# Altium PCB PCB_big.PcbDoc (part 2 of 2)
Units mil, origin at the board's own origin, x right, y up, seen from the top; angles counter-clockwise.
Board outline 3000 x 3000 mil, 2 copper layers (Top Layer, Bottom Layer); 49 components, 129 nets, 355 pads, 242 vias.
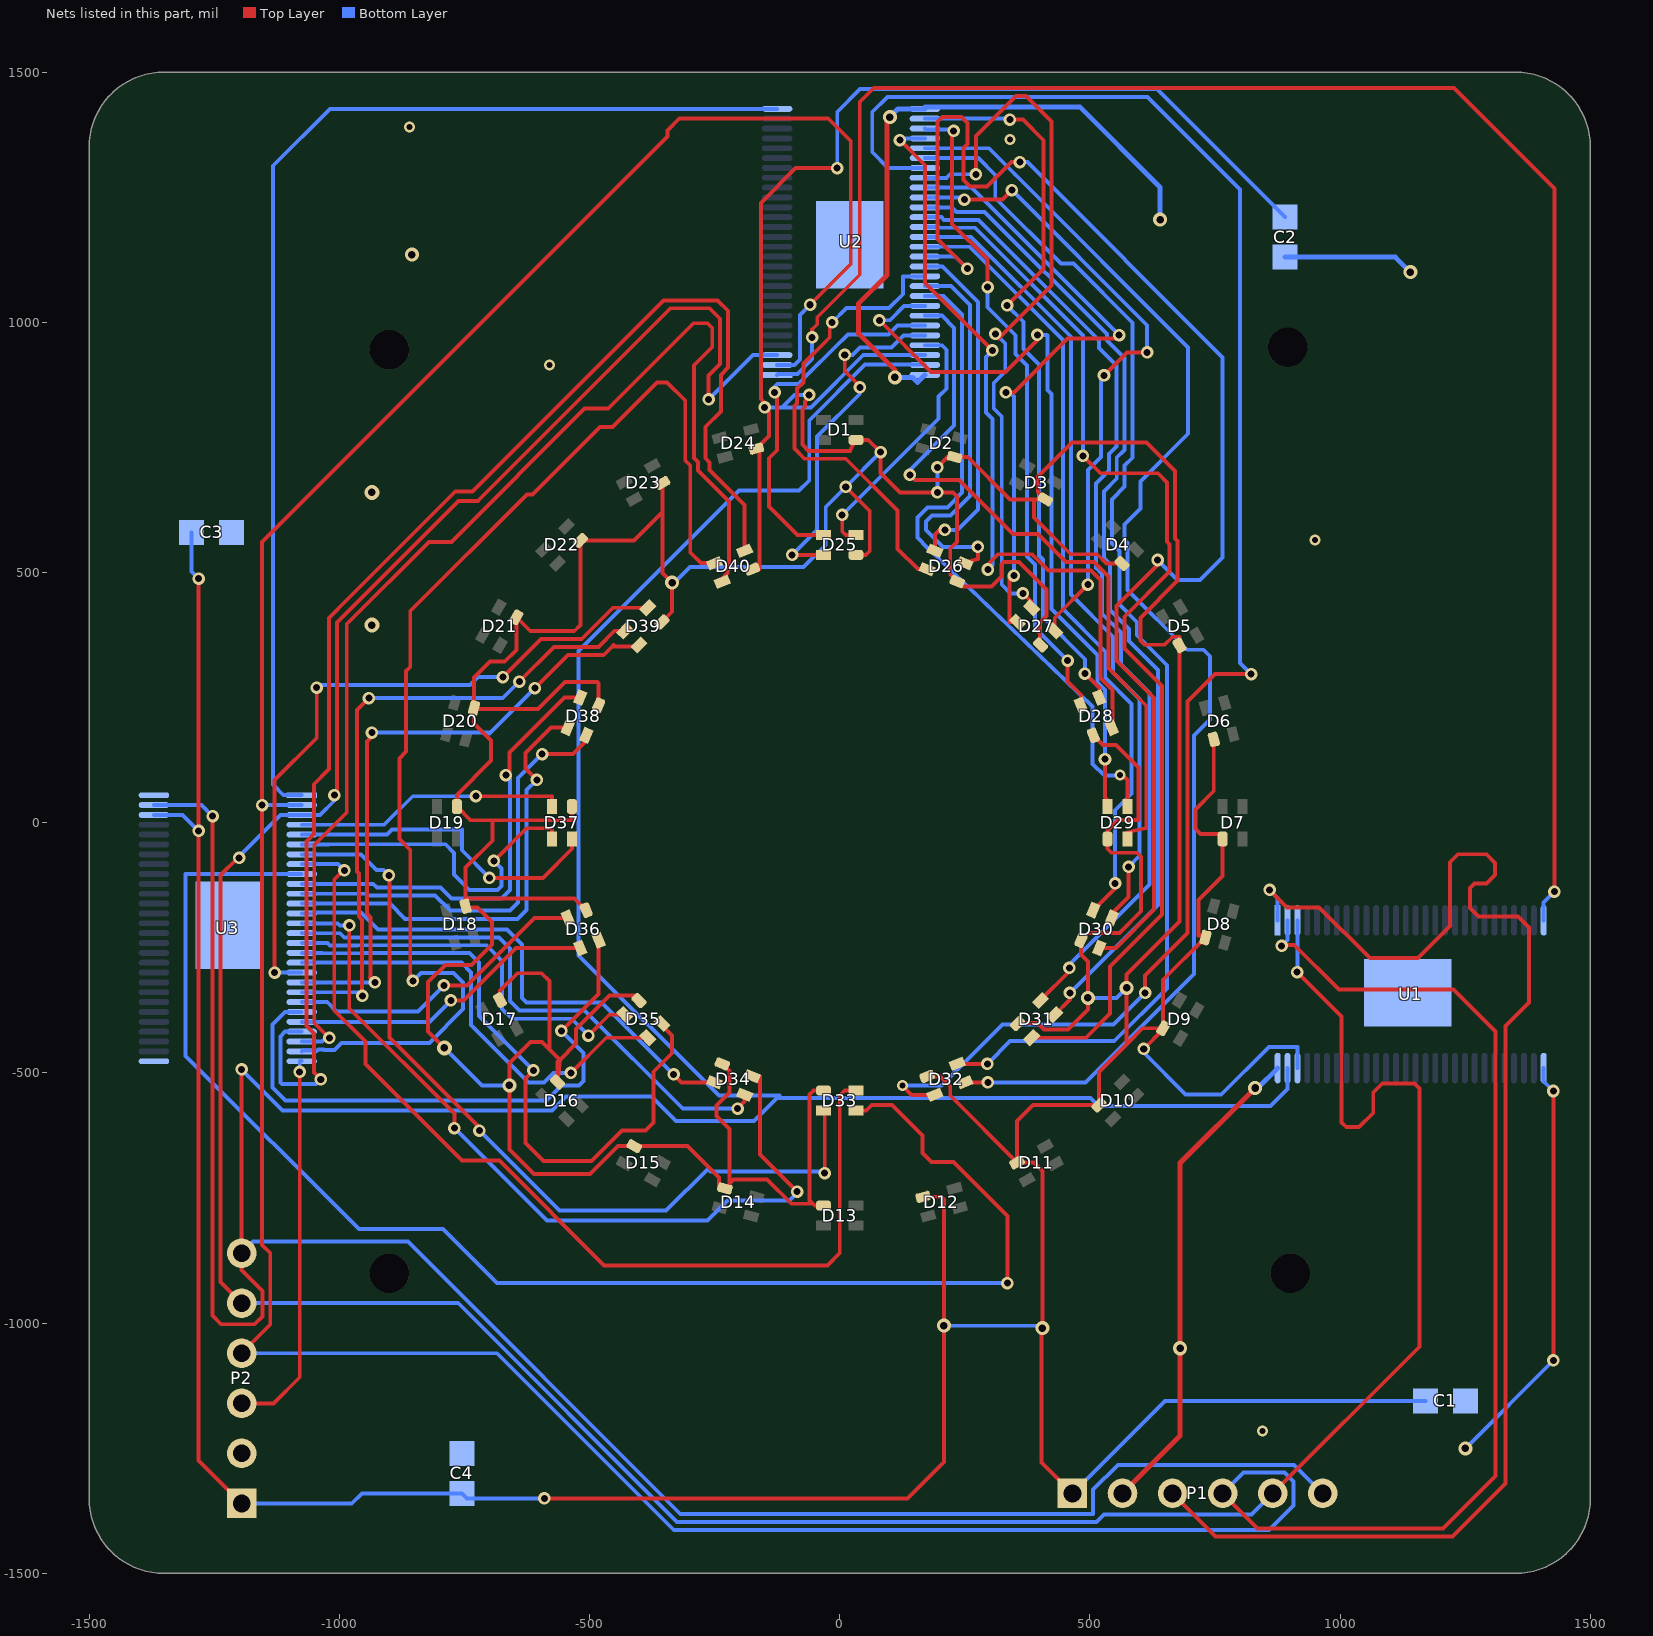
[diagram p2: the nets of this part, all layers, seen from the top]

## Via types
v1: diameter 25, hole 14, Top Layer to Bottom Layer, 214 vias
v2: diameter 28, hole 15, Top Layer to Bottom Layer, 16 vias
v3: diameter 22, hole 12, Top Layer to Bottom Layer, 7 vias
v4: diameter 30, hole 15, Top Layer to Bottom Layer, 5 vias

## Nets (pads, with @x,y where several pads share a name; then routed paths per layer and width w, separated by ;. In a path a pad name is that pad's centre, name@x,y a point inside that pad or via, vN(x,y) a via of type N, cw(c..) or ccw(c..) an arc to the next point about the centre after c; other vN are vias at no path point) (continued)
D25_B: D25.4 U2.53 | length 526
  Top Layer w7.87: v1(5,615) 5,582 12,575 D25.4@32.5,575
  Bottom Layer w7.87: v1(5,615) 197.2,807.2 197.2,851.44 212.95,867.18 212.95,945.11 204,954.06 U2.53@170.28,954.05
D25_G: D25.3 U2.51 | length 734
  Top Layer w7.87: v1(-130,860) -125.62,860 -125.31,860.31 -125.31,744.31 -141.31,728.31 -141.31,632.31 -84,575 D25.3@-32.5,575
  Bottom Layer w7.87: v1(-130,860) -130,871 -124,877 -85,877 -82.38,877 -63,896.38 -10,949.38 16.12,975.5 97.08,975.5 115,993.43 U2.51@170.28,993.43
D25_R: D25.2 U2.52 | length 707.2
  Top Layer w7.87: v1(-95,535) D25.2@-32.5,535 ; v1(10,935) 10,902.96 40,872.96 v1(40,870)
  Bottom Layer w7.87: v1(-95,535) -45.19,584.81 -45.19,771.81 40,857 v1(40,870) ; v1(10,935) 25.42,935 40.42,950 103.26,950 127,973.74 U2.52@170.28,973.74
D26_B: D26.4 U2.47 | length 783.3
  Top Layer w7.87: D26.4@250.07,518.79 276.18,526.98 v1(276.18,551)
  Bottom Layer w7.87: U2.47@170.28,1072.16 222.56,1072.17 260.44,1034.28 260.44,653.17 221.52,614.25 184.25,614.25 172,602 172,585 206,551 v1(276.18,551)
D26_G: D26.3 U2.45 | length 689.1
  Top Layer w7.87: D26.3@190.02,543.67 190.02,575.96 199.06,585 v1(210,585)
  Bottom Layer w7.87: U2.45@170.28,1111.53 205.46,1111.54 276.19,1040.81 276.19,626.19 235,585 v1(210,585)
D26_R: D26.2 U2.46 | length 938
  Top Layer w7.87: v1(-15,1000) -20,995 -20,970 -30,960 -72.74,917.26 -72.74,880 -85.31,867.43 -85.31,838.04 -90.57,832.78 -90.57,747.57 -70.31,727.31 12,727.31 115.47,623.84 115.47,547.24 156,506.71 D26.2@174.71,506.71
  Bottom Layer w7.87: v1(-15,1000) 13.31,1028.31 98.31,1028.31 126,1056 126,1091.85 U2.46@170.28,1091.85
D27_B: D27.4 U2.38 | length 1275.4
  Top Layer w7.87: v1(249,1245) 325,1245 v1(344,1264) ; D27.4@429.57,383.61 429.57,409.57 v1(496,476) ; v1(528,894) 574,940 v1(614,940)
  Bottom Layer w7.87: U2.38@170.28,1249.33 244.67,1249.33 v1(249,1245) ; v1(344,1264) 614,994 v1(614,940) ; v1(496,476) 496,705.11 521.95,731.06 521.95,887.95 v1(528,894)
D27_G: D27.3 U2.36 | length 1487
  Top Layer w7.87: v1(272,1295.71) 272,1372 352,1452 372,1452 423.06,1400.94 423.06,1073.06 317.31,967.31 311,973.62 v1(311,977) ; v1(366,458.47) 383.61,440.87 D27.3@383.61,429.57
  Bottom Layer w7.87: U2.36@170.28,1288.7 213,1288.7 220.01,1295.71 v1(272,1295.71) ; v1(311,977) 330.68,957.32 330.68,901.77 307.69,878.77 307.69,827.31 323.69,811.31 323.69,476.16 341.37,458.47 v1(366,458.47)
D27_R: D27.2 U2.37 | length 1283.4
  Top Layer w7.87: v1(332,860) 348,860 455.19,967.19 558,967.19 v1(558,974.27) ; v1(348,494) 338.75,494 338.75,401.28 D27.2@355.32,401.28
  Bottom Layer w7.87: U2.37@170.28,1269.01 170.57,1269.31 262.96,1269.31 v1(558,974.27) ; v1(332,860) 340,860 348,852 v1(348,494)
D28_B: D28.4 U2.32 | length 1572.9
  Top Layer w7.87: v1(120,1364) 170.28,1313.72 170.28,1078.72 v1(305,944) ; v1(296,506) 296,516.44 316,536.44 384.56,536.44 417,504 502.38,504 521.25,485.13 521.25,289.37 545.35,265.28 545.35,190.02 D28.4@543.67,190.02
  Bottom Layer w7.87: v1(120,1364) 123.44,1367.44 U2.32@170.28,1367.44 ; v1(296,506) 305,515 305,806.88 291.94,819.94 291.94,930.94 v1(305,944)
D28_G: D28.3 U2.30 | length 1475
  Top Layer w7.87: v1(334.55,1033.57) 407.31,1106.33 407.31,1363.69 366,1405 v1(340,1405) ; v1(490,298) 518.79,269.21 D28.3@518.79,250.07
  Bottom Layer w7.87: U2.30@170.28,1406.81 170.36,1406.89 338.11,1406.89 v1(340,1405) ; v1(334.55,1033.57) 367.06,1001.06 367.06,946.88 398,915.94 398,534.06 406.06,526 406.06,410.68 490,326.74 v1(490,298)
D28_R: D28.2 U2.31 | length 1314.5
  Top Layer w7.87: v1(227.42,1382.58) 224.69,1379.85 224.69,1196.69 295.31,1126.07 v1(295.31,1070.06) ; v1(455.1,323.91) 455.1,282.42 481.84,255.69 D28.2@481.84,234.76
  Bottom Layer w7.87: U2.31@170.28,1387.12 172.25,1385.16 224.84,1385.16 v1(227.42,1382.58) ; v1(295.31,1070.06) 295.31,1030 351.31,974 351.31,936.63 374.31,913.63 374.31,532.31 390.31,516.31 390.31,388.7 v1(455.1,323.91)
D29_B: D29.4 U2.50 | length 1465.3
  Top Layer w7.87: v1(140,695) 150,685 238.27,685 346.11,577.16 395.84,577.16 452.31,520.69 507.96,520.69 537,491.65 537,309.16 612.4,233.76 612.4,-10.6 575,-19 D29.4@575,-32.5
  Bottom Layer w7.87: v1(140,695) 140,705 228.7,793.7 228.7,988.41 204,1013.11 U2.50@170.28,1013.11
D29_G: D29.3 U2.48 | length 1332.5
  Top Layer w7.87: v3@560,94 566,94 575,85 D29.3@575,32.5
  Bottom Layer w7.87: U2.48@170.28,1052.48 207.41,1052.48 244.44,1015.45 244.44,659.44 215,630 175,630 155,610 155,569.6 175.74,548.86 505,232 505,117.62 528.62,94 v3@560,94
  other v3: 560,95
D29_R: D29.2 U2.49 | length 1518
  Top Layer w7.87: v1@85.04,1009.96 v1(79.09,1004) 182.17,900.91 330.91,900.91 395,965 v1(395,975) ; v1(530,127) 530,51 535,46 D29.2@535,32.5
  Bottom Layer w7.87: v1(79.09,1004) 100,1004 128.8,1032.8 U2.49@170.28,1032.8 ; v1(395,975) 395,974.83 413.4,974.83 415,973.23 415,865 423,857 423,426.76 514.76,335 514.76,280.24 530,265 v1(530,127)
D30_B: D30.4 U2.44 | length 2773.4
  Top Layer w7.87: v1(255,1107) 195.69,1166.31 195.69,1400.69 205,1410 243,1410 255,1398 255,1356 247,1348 247,1284 260,1271 294,1271 343,1320 v1(360,1320) ; D30.4@518.79,-250.07 551.57,-250.07 628.2,-173.44 628.2,249.18 553.19,324.19 553.19,433.19 635,515 v1(635,525)
  Bottom Layer w7.87: U2.44@170.28,1131.22 230.78,1131.22 v1(255,1107) ; v1(360,1320) 375,1320 765,930 765,530 720,485 675,485 v1(635,525)
D30_G: D30.3 U2.42 | length 1615
  Top Layer w7.87: D30.3@543.67,-190.02 543.67,-181.72 577,-148.39 v1(577,-88)
  Bottom Layer w7.87: U2.42@170.28,1170.59 262.19,1170.59 461.69,971.09 461.69,456.24 546.26,371.67 546.26,300.17 599.06,247.37 599.06,-65.94 v1(577,-88)
D30_R: D30.2 U2.43 | length 1580.5
  Top Layer w7.87: D30.2@506.71,-174.71 550,-131.42 v1(550,-121)
  Bottom Layer w7.87: U2.43@170.28,1150.91 259.6,1150.91 445.94,964.57 445.94,427.09 530.51,342.52 530.51,290.16 583,237.68 583,58 550,25 v1(550,-121)
D31_B: D31.4 U2.41 | length 2188.3
  Top Layer w7.87: D31.4@383.61,-429.57 492,-429.57 540,-381.57 540,-287 644,-183 644,272.94 568.94,348 568.94,411.63 659.31,502 659.31,556.15 653.5,561.95 653.5,563.12 654.31,563.93 654.31,680 636,698.31 520.69,698.31 v1(486,733)
  Bottom Layer w7.87: U2.41@170.28,1190.28 192.5,1190.28 193.88,1188.9 270.4,1188.9 486,973.29 v1(486,733)
D31_G: D31.3 U2.39 | length 1989.7
  Top Layer w7.87: D31.3@429.57,-383.61 460,-353.17 v1(460,-340)
  Bottom Layer w7.87: U2.39@170.28,1229.64 224,1229.65 233.25,1220.39 289.61,1220.39 533.69,976.31 533.69,964 568.94,928.75 568.94,745.05 553.44,729.56 553.44,687.5 527.94,662 527.94,529 540,516.94 540,425 577.76,387.24 577.76,363.22 635.49,305.48 635.49,-164.51 v1(460,-340)
D31_R: D31.2 U2.40 | length 1934.6
  Top Layer w7.87: D31.2@401.28,-355.32 401.28,-354.4 459,-296.68 v1(459,-290)
  Bottom Layer w7.87: U2.40@170.28,1209.96 202.94,1209.96 208.25,1204.65 277.23,1204.65 510.54,971.33 510.54,971.03 517.75,963.82 517.75,948.79 553.1,913.44 553.1,752.14 537.7,736.74 537.7,703.5 512.19,678 512.19,509.44 524.25,497.38 524.25,417.63 562.01,379.87 562.01,315.92 618.76,259.16 618.76,-123.24 459,-283 v1(459,-290)
D32_B: D32.4 U2.35 | length 3401.1
  Top Layer w7.87: v3(125,-525) 143.67,-543.67 D32.4@190.02,-543.67 ; v1(610,-340) 610,-305 694.72,-220.28 694.72,241.99 749.73,297 v1(822,297)
  Bottom Layer w7.87: v3(125,-525) 203,-525 325,-403 547,-403 v1(610,-340) ; U2.35@170.28,1308.39 96.61,1308.39 65,1340 65,1420 95,1450 615,1450 800,1265 800,319 v1(822,297)
D32_G: D32.3 U2.33 | length 2646.6
  Top Layer w7.87: D32.3@250.07,-518.79 v1(296.21,-518.79)
  Bottom Layer w7.87: U2.33@170.28,1347.76 298.24,1347.76 335.69,1310.31 335.69,1309.93 349.93,1295.69 350.31,1295.69 696,950 696,777.31 600.69,682 600.69,628 568.69,596 568.69,565.31 575,559 575,465 694.38,345.62 727.11,345.62 740,332.73 740,206 708,174 708,-302 491.21,-518.79 v1(296.21,-518.79)
D32_R: D32.2 U2.34 | length 2452.1
  Top Layer w7.87: D32.2@234.76,-481.84 v1(295.13,-481.84)
  Bottom Layer w7.87: U2.34@170.28,1328.07 277.02,1328.07 310.69,1294.4 310.69,1248.69 442.38,1117 466.74,1117 584.69,999.05 584.69,729.3 569.19,713.81 569.19,671.5 543.69,646 543.69,558.23 559.25,542.67 559.25,435.75 593.5,401.5 593.5,375.41 654.2,314.72 654.2,-330.8 548.48,-436.52 340.45,-436.52 v1(295.13,-481.84)
D33_B: D33.4 U3.7 | length 1697.1
  Top Layer w7.87: v1(-901,-105) -899.25,-106.75 -899.25,-429.48 -720,-608.73 v1(-720,-615) ; D33.4@-32.5,-575 -32,-575 -30,-577 v1(-30,-700)
  Bottom Layer w7.87: U3.7@-1075,-63.11 -956.58,-63.11 -925.38,-94.31 -911.69,-94.31 v1(-901,-105) ; v1(-720,-615) -560,-775 -347,-775 -263.42,-691.42 -257.91,-696.94 -33.06,-696.94 v1(-30,-700)
D33_G: D33.3 U3.9 | length 2979.2
  Top Layer w7.87: D33.3@32.5,-575 53,-575 64,-564 104,-564 165,-625 165,-660 183,-678 227.27,-678 335,-785.73 v1(335,-920)
  Bottom Layer w7.87: U3.9@-1075,-102.48 -1307,-102.48 -1307,-466 -961,-812 -793,-812 -685,-920 v1(335,-920)
D33_R: D33.2 U3.8 | length 1993.3
  Top Layer w7.87: v1(-990,-95) -991.24,-95 -1010,-113.76 -1010,-375 -948,-437 -948,-482 -755,-675 -680,-675 -470.69,-884.31 -24.31,-884.31 0,-860 0,-545 10,-535 D33.2@32.5,-535
  Bottom Layer w7.87: U3.8@-1075,-82.8 -1002.21,-82.79 v1(-990,-95) v1@-990,-89.82
D34_B: D34.4 U3.13 | length 1030.2
  Top Layer w7.87: v1(-332,-503) -316.21,-518.79 D34.4@-250.07,-518.79
  Bottom Layer w7.87: U3.13@-1075,-181.22 -1049.76,-181.22 -1049.76,-179.25 -956.44,-179.25 -922.38,-213.3 -664.7,-213.3 -635,-243 -635,-350 -625.76,-359.24 -475.76,-359.24 v1(-332,-503)
D34_G: D34.3 U3.15 | length 1111
  Top Layer w7.87: v1(-204,-571.11) -190.02,-557.13 D34.3@-190.02,-543.67
  Bottom Layer w7.87: U3.15@-1075,-220.59 -1074.84,-220.75 -998.63,-220.75 -990.07,-229.31 -969.93,-229.31 -969.67,-229.05 -681.2,-229.05 -658.97,-251.28 -658.97,-356 -639.98,-374.99 -509.76,-374.99 -313.64,-571.11 v1(-204,-571.11)
D34_R: D34.2 U3.14 | length 1652.7
  Top Layer w7.87: v1(-980,-205) -980,-371 -770,-581 v1(-770,-610) ; D34.2@-174.71,-506.71 -159,-506.71 -159,-663 v1(-85,-737)
  Bottom Layer w7.87: U3.14@-1075,-200.9 -1003,-200.9 -998.9,-205 v1(-980,-205) ; v1(-770,-610) -585,-795 -264,-795 -224,-755 -100,-755 -85,-740 v1(-85,-737)
D35_B: D35.4 U3.16 | length 795.9
  Top Layer w7.87: v1(-502.42,-425.42) -460.61,-383.61 D35.4@-429.57,-383.61
  Bottom Layer w7.87: U3.16@-1075,-240.28 -1023.84,-240.27 -1019.05,-245.06 -963.41,-245.06 -963.15,-244.8 -705.92,-244.8 -674.72,-276 -674.72,-372 -655.03,-391.69 -536.15,-391.69 v1(-502.42,-425.42)
D35_G: D35.3 U3.18 | length 889.8
  Top Layer w7.87: v1(-537,-500) -466.57,-429.57 D35.3@-383.61,-429.57
  Bottom Layer w7.87: U3.18@-1075,-279.64 -756,-279.64 -736.83,-298.81 -736.83,-404.55 -622.07,-519.31 -591,-519.31 -571.69,-500 v1(-537,-500)
D35_R: D35.2 U3.17 | length 1298.8
  Top Layer w7.87: v1(-612,-495) -628,-511 -628,-640 -592,-676 -496,-676 -435.32,-615.32 -388,-615.32 -372,-599.32 -372,-497.59 -335,-460.59 -335,-425 -355.32,-404.68 D35.2@-355.32,-401.28
  Bottom Layer w7.87: U3.17@-1075,-259.96 -1034.9,-260.55 -1034.64,-260.81 -956.88,-260.81 -956.63,-260.55 -740,-260.55 -721.08,-279.47 -721.08,-385.92 v1(-612,-495)
D36_B: D36.4 U3.22 | length 616.5
  Top Layer w7.87: v1(-791,-325) -745,-325 -610.02,-190.02 D36.4@-543.67,-190.02
  Bottom Layer w7.87: U3.22@-1075,-358.38 -1024,-358.38 -1005.38,-377 -843,-377 v1(-791,-325)
D36_G: D36.3 U3.24 | length 617.4
  Top Layer w7.87: v1(-777,-355) -752,-355 -647.07,-250.07 D36.3@-518.79,-250.07
  Bottom Layer w7.87: U3.24@-1075,-397.76 -819.75,-397.75 v1(-777,-355)
D36_R: D36.2 U3.23 | length 1172.5
  Top Layer w7.87: v1(-556,-416) -481.84,-341.84 D36.2@-481.84,-234.76
  Bottom Layer w7.87: U3.23@-1075,-378.07 -1108.07,-378.07 -1133.07,-403.07 -1133.07,-528.99 -1107.06,-555 -585.94,-555 -555.94,-525 -521,-525 -512,-516 -512,-460 v1(-556,-416)
D37_B: D37.4 U3.4 | length 544.1
  Top Layer w7.87: v1(-727,53) -575,53 D37.4@-575,32.5
  Bottom Layer w7.87: U3.4@-1075,-4.05 -910.2,-4.05 -853.14,53 v1(-727,53)
D37_G: D37.3 U3.6 | length 687.4
  Top Layer w7.87: v1(-691.25,-76.25) -626,-11 -575,-11 D37.3@-575,-32.5
  Bottom Layer w7.87: U3.6@-1075,-43.43 -1021.06,-43.42 -1020.58,-42.94 -788,-42.94 -770.84,-60.1 -770.84,-103.78 -740.31,-134.31 -684,-134.31 -675.69,-126 -675.69,-91.81 v1(-691.25,-76.25)
D37_R: D37.2 U3.5 | length 651.8
  Top Layer w7.87: v1(-700,-110) -593,-110 -535,-52 D37.2@-535,-32.5
  Bottom Layer w7.87: U3.5@-1075,-23.74 -904.67,-23.74 -894.45,-13.51 -755.44,-13.51 -755.1,-13.85 -755.1,-54.9 v1(-700,-110)
D38_B: D38.4 U3.10 | length 902
  Top Layer w7.87: v1(-667,95) -660,102 -660,140 -549.93,250.07 D38.4@-518.79,250.07
  Bottom Layer w7.87: U3.10@-1075,-122.16 -932.15,-122.16 -925,-129.31 -797.69,-129.31 -776,-151 -676,-151 -659,-134 -659,87 v1(-667,95)
D38_G: D38.3 U3.12 | length 905.5
  Top Layer w7.87: v1(-605.27,85.73) -628,108.47 -628,139 -576.98,190.02 D38.3@-543.67,190.02
  Bottom Layer w7.87: U3.12@-1075,-161.54 -899,-161.53 -868.53,-192 -644,-192 -626,-174 -626,65 v1(-605.27,85.73)
D38_R: D38.2 U3.11 | length 879.7
  Top Layer w7.87: v1(-594.69,137) -533,137 -506.71,163.29 D38.2@-506.71,174.71
  Bottom Layer w7.87: U3.11@-1075,-141.85 -944.27,-141.85 -941.06,-145.06 -808.56,-145.06 -778.06,-175.56 -658.51,-175.56 -642.69,-159.73 -642.69,89 v1(-594.69,137)
D39_B: D39.4 U3.19 | length 1385.6
  Top Layer w7.87: v1(-1129,-299.33) -1129,85 -1045,169 v1(-1045,270) ; v1(-673,291) -597.06,366.94 -515.5,366.94 -452.87,429.57 D39.4@-383.61,429.57
  Bottom Layer w7.87: v1(-1129,-299.33) U3.19@-1075,-299.33 ; v1(-1045,270) -1040,275 -738.75,275 -722.75,291 v1(-673,291)
D39_G: D39.3 U3.21 | length 1300.7
  Top Layer w7.87: v1(-954,-346) -954.69,-345.31 -954.69,-193.93 -960.75,-187.87 -960.75,-101.62 -965,-97.37 -965,224.94 v1(-940.94,249) ; v1(-640.34,282.06) -571.21,351.19 -482.19,351.19 -449.77,383.61 D39.3@-429.57,383.61
  Bottom Layer w7.87: U3.21@-1075,-338.7 -961.3,-338.7 v1(-954,-346) ; v1(-940.94,249) -673.4,249 v1(-640.34,282.06)
D39_R: D39.2 U3.20 | length 1271.8
  Top Layer w7.87: v1(-935,180) -935,172 -945,162 -945,-181.35 -937.31,-189.04 -937.31,-307.44 -938.94,-309.07 v1(-929,-319.01) ; v1(-609.12,269) -542.68,335.44 -471.5,335.44 -451.62,355.32 -451.62,352 -401.28,352 D39.2@-401.28,355.32
  Bottom Layer w7.87: U3.20@-1075,-319.02 v1(-929,-319.01) ; v1(-935,180) -702.12,180 -700.12,178 v1(-609.12,269)
D40_B: D40.4 U3.25 | length 2776.3
  Top Layer w7.87: v1(-1037,-513) -1050.75,-499.25 -1050.75,-421.52 -1065.75,-406.52 -1065.75,-37.79 -1050.75,-22.79 -1050.75,76.94 -1020.69,107 -1020.69,409.3 -984.05,445.95 -768.31,661.69 -733.93,661.69 -351.81,1043.81 -244,1043.81 -223.19,1023 -223.19,909.36 -237.56,894.99 -237.56,822.06 -268.36,791.25 -268.36,728.28 -260,719.92 -260,705 -190.02,635.02 D40.4@-190.02,543.67
  Bottom Layer w7.87: U3.25@-1075,-417.44 -1108,-417.44 -1117.32,-426.76 -1117.32,-518.99 -1114,-522.31 -1046.31,-522.31 v1(-1037,-513)
D40_G: D40.3 U3.27 | length 2404.9
  Top Layer w7.87: v1(-853,-316) -858.15,-310.85 -858.15,-54.13 -879.81,-32.48 -879.81,128.78 -866.5,142.09 -866.5,303.05 -858.15,311.39 -858.15,422.85 -625,656 -613.74,656 -478.74,791 -454.21,791 -365.21,880 -344.75,880 -308.75,844 -308.75,724.13 -298.69,714.07 -298.69,705.15 -298.69,540 -277.48,518.79 D40.3@-250.07,518.79
  Bottom Layer w7.87: U3.27@-1075,-456.81 -1073.03,-454.84 -1043.06,-454.84 -1041.09,-452.87 -1031.51,-452.87 -1030.07,-454.31 -1009.93,-454.31 -995.62,-440 -820,-440 -752.58,-372.58 -752.58,-319.42 -772,-300 -837,-300 v1(-853,-316)
D40_R: D40.2 U3.26 | length 2464
  Top Layer w7.87: v1(-1020,-430) -1050,-400 -1050,-44.31 -985,20.69 -985,397.38 -821.1,561.28 -775.7,561.28 -509.59,827.39 -462.61,827.39 -292,998 -264.44,998 -254.69,988.25 -254.69,950.31 -290.9,914.09 -290.9,728.55 -282.94,720.59 -282.94,711.67 -282.94,703.94 -220.85,641.85 -220.85,507.44 -223.87,504.43 -223.87,499.13 -234.76,488.24 D40.2@-234.76,481.84
  Bottom Layer w7.87: U3.26@-1075,-437.12 -1034.12,-437.12 -1027,-430 v1(-1020,-430)
DATA: P1.3 U1.1 | length 2874.5
  Top Layer w7.87: P1.3@665,-1340 750.75,-1425.75 1224.25,-1425.75 1330,-1320 1330,-406 1377,-359 1377,-209 1354.94,-186.94 1276.32,-186.94 1259.69,-170.31 1259.69,-130 1268,-121.69 1292,-121.69 1309,-104.69 1309,-80 1292,-63 1235,-63 1219.06,-78.94 1219.06,-206.24 1154.99,-270.31 1059.25,-270.31 957.94,-169 894,-169 v1(859,-134)
  Bottom Layer w7.87: v1(859,-134) 875,-150 U1.1@875,-195
DATA_1: U1.28 U2.1 | length 3589.6
  Top Layer w7.87: v1(-55,970) -55,986 -45,996 -45,1010 40,1095 40,1440 68,1468 1227,1468 1428,1267 v1(1428,-137.5)
  Bottom Layer w7.87: U2.1@-125,895 -123.03,896.97 -84.68,896.97 -55,926.65 v1(-55,970) ; U1.28@1406.49,-195 1406.49,-159 v1(1428,-137.5)
DATA_2: U2.28 U3.1 | length 2357.2
  Bottom Layer w7.87: U3.1@-1075,55 -1111.31,55 -1132.31,76 -1132.31,1312.69 -1018.5,1426.5 U2.28@-125,1426.49
GND: C1.1 C2.1 C3.1 C4.1 P1.2 P2.2 U1.29 U1.56 U1.57 U2.29 U2.56 U2.57 U3.29 U3.56 U3.57 | length 3412.7
  Top Layer w7.87: v1(1426,-1074) v1(1426,-536)
  Top Layer w10: v2(100,1410) 94.63,1404.63 94.63,1094.63 37.96,1037.96 37.96,977.04 110,905 v2(110,890) ; P1.2@565,-1340 680,-1225 v2(680,-1050) 680,-680 v2(830,-530)
  Bottom Layer w7.87: v2(1250,-1250) v1(1426,-1074) ; U1.29@1406.49,-490.28 1406.49,-516.49 v1(1426,-536)
  Bottom Layer w10: v2(100,1410) 116.5,1426.5 U2.29@170.28,1426.49 170.28,1430.37 479.63,1430.37 640,1270 v2(640,1205) ; v2(110,890) 145.28,890 155.28,880 U2.56@170.28,895 ; v2(830,-530) 835.28,-530 U1.56@875,-490.28 ; C2.1@890,1130 1110,1130 v2(1140,1100)
  other v2: -855,1135
  other v3: 845,-1215 950,565 -580,915 340,1365 -860,1390
  other v4: -935,395 -935,660
GSCLK: P1.6 P2.6 U1.55 U2.55 U3.55 | length 8598.8
  Top Layer w7.87: v1(-1253,13) -1253,-985 -1236,-1002 -1169,-1002 -1153.66,-986.66 -1153.66,-935.34 -1195,-894 P2.6@-1195,-860 v1(-1195,-493)
  Bottom Layer w7.87: U3.55@-1370.28,35.32 -1275.32,35.32 v1(-1253,13) ; P2.6@-1195,-860 -1172,-837 -863,-837 -318.66,-1381.34 506.34,-1381.34 506.34,-1332.66 556.09,-1282.91 907.91,-1282.91 P1.6@965,-1340 ; v1(-1195,-493) -1113,-575 -575,-575 -547,-547 -376,-547 -327,-596 -171,-596 -125,-550 500.93,-550 516.93,-566 860.68,-566 894.68,-532 U1.55@894.68,-490.28 ; -120,-545 -241.64,-545 -521.57,-265.07 -521.57,343.47 -201.09,663.94 -81,663.94 -60.94,684 -60.94,804.09 50.78,915.81 169.15,915.81 U2.55@170.28,914.68
LAT: P1.5 P2.5 U1.3 U2.3 U3.3 | length 6759.4
  Top Layer w7.87: v1(-1200,-70) -1202.63,-70 -1237,-104.37 -1237,-918 P2.5@-1195,-960 ; v1(-1010,55) -1004.94,60.06 -1004.94,399.71 -761.89,642.76 -723.24,642.76 -337.94,1028.06 -260,1028.06 -238.94,1007 -238.94,917 -262,893.94 v1(-262,846) ; P1.5@865,-1340 1158,-1047 1158,-531 1148,-521 1084,-521 1066,-539 1066,-580 1037.69,-608.31 1012,-608.31 1002.69,-599 1002.69,-387.22 v1(914,-298.54)
  Bottom Layer w7.87: v1(-1200,-70) -1200,-67.37 -1117,15.63 U3.3@-1075,15.63 -1038.37,15.63 -1010,44 v1(-1010,55) ; P2.5@-1195,-960 -762.27,-960 -325.18,-1397.09 513,-1397.09 528.09,-1382 823,-1382 P1.5@865,-1340 ; v1(-262,846) -173.63,934.37 U2.3@-125,934.37 ; v1(914,-298.54) 914.37,-298.17 U1.3@914.37,-195
SCLK: P1.4 P2.4 U1.2 U2.2 U3.2 | length 8354
  Top Layer w7.87: P2.4@-1195,-1060 -1137.91,-1002.91 -1137.91,-860.09 -1154,-844 v1(-1154,35.32) -1154,561 -344.06,1370.95 -344.06,1383.59 -320.06,1407.58 -23.58,1407.58 22,1362 22,1116 v1(-59,1035) ; P1.4@765,-1340 835,-1410 1205,-1410 1310,-1305 1310,-417 1226.56,-333.56 997.77,-333.56 908.06,-243.84 885.16,-243.84 v1(883,-246)
  Bottom Layer w7.87: P2.4@-1195,-1060 -684.54,-1060 -331.71,-1412.84 857.5,-1412.84 906.34,-1364 906.34,-1316 889,-1298.66 806.34,-1298.66 P1.4@765,-1340 ; v1(-1154,35.32) U3.2@-1075,35.32 ; U2.2@-125,914.68 -90.53,914.69 -79.31,925.9 -79.31,1014.69 v1(-59,1035) ; v1(883,-246) 894.68,-234.32 U1.2@894.68,-195
SOUT: P2.3 U3.28 | length 773
  Top Layer w7.87: P2.3@-1195,-1160 -1131,-1160 -1079,-1108 v1(-1079,-498)
  Bottom Layer w7.87: v1(-1079,-498) -1079,-476.49 U3.28@-1075,-476.49
VCC: C1.2 C2.2 C3.2 C4.2 D1.1 D2.1 D3.1 D4.1 D5.1 D6.1 D7.1 D8.1 D9.1 D10.1 D11.1 D12.1 D13.1 D14.1 D15.1 D16.1 D17.1 D18.1 D19.1 D20.1 D21.1 D22.1 D23.1 D24.1 D25.1 D26.1 D27.1 D28.1 D29.1 D30.1 D31.1 D32.1 D33.1 D34.1 D35.1 D36.1 D37.1 D38.1 D39.1 D40.1 P1.1 P2.1 U1.54 U2.54 U3.54 | length 20446.3
  Top Layer w7.87: v1(-1281,488) v1(-1281,-16.37) -1281,-1274 P2.1@-1195,-1360 ; v4(-790,-450) -822.49,-417.51 -822.49,-318.5 -788,-284.01 -735.6,-284.01 -695,-243.41 -695,-198 -724,-169 -747.34,-169 D18.1@-747.34,-166.6 -747.34,-151 ; D17.1@-680,-355.59 D17.1@-678.76,-354.35 -678.76,-335.45 -644,-300.69 -595.62,-300.69 -580.31,-316 -580.31,-452.69 ; v1(-590,-1350) 135,-1350 208,-1277 v2(208,-1005) 208,-752.34 203,-747.34 D12.1@166.6,-747.34 ; D37.1@-535,32.5 -535,5 -693.69,5 ; D36.1@-506.71,-174.71 -530.42,-151 -747.34,-151 ; D38.1@-481.84,234.76 -481.84,278.44 -484.4,281 -549,281 -603,227 D20.1@-730.52,227 ; D35.1@-401.28,-355.32 -411.61,-345 -460,-345 -526.73,-411.73 -526.73,-441 -559.37,-473.63 ; D39.1@-355.32,401.28 -335,421.61 v2(-335,480) -354.35,499.35 -354.35,621.02 ; D23.1@-354.35,678.76 -354.35,621.02 ; D34.1@-234.76,-481.84 -230.22,-483.72 -231,-484.51 -231,-485 -220,-496 -220,-538.8 -246.33,-565.13 -246.33,-585.67 -220,-612 -220,-721.07 ; D40.1@-174.71,506.71 -160,506.71 -160,747.35 D24.1@-166.6,747.35 -141.06,772.89 -141.06,821.06 v1(-150,830) -150,839 -157.31,846.31 -157.31,1238.69 -88,1308 v1(-5,1308) ; v1(-61,855) -61,850.08 -69.56,841.51 -69.56,831.52 -74.82,826.26 -74.82,755.82 -62.06,743.06 20.06,743.06 32,765 D1.1@32.5,765 57,765 v1(81.5,740.5) 81.5,698.5 120,660 v1(195,660) 226,660 234.31,651.69 234.31,561.31 220.85,547.85 220.85,495.75 D26.1@234.76,481.84 244.53,472.07 303.07,472.07 323,492 323,516.38 327.31,520.69 357.83,520.69 412.82,465.7 412.82,412.82 400.36,400.36 400.36,356.25 D27.1@401.28,355.32 ; D13.1@-32.5,-765 -49.69,-765 -53.38,-761.31 ; D33.1@-32.5,-535 -52,-535 -60,-543 -60,-754.69 -53.38,-761.31 ; v1(12,671) 60,623 60,543 52,535 D25.1@32.5,535 ; D32.1@174.71,-506.71 201.71,-506.71 220.85,-525.85 220.85,-545.26 D11.1@354.35,-678.76 ; v1(195,710) 215.52,730.52 D2.1@229.39,730.52 255.77,730.52 340.04,646.26 388.28,646.26 ; D31.1@355.32,-401.28 355.32,-400.36 395.36,-400.36 407.82,-412.82 456.18,-412.82 495.68,-373.32 v2(495.68,-350) 495.68,-276.96 481.84,-263.11 D30.1@481.84,-234.76 496.6,-220 558.88,-220 602,-176.88 602,-68 594,-60 543,-60 535,-52 D29.1@535,-32.5 535,-15.08 556,5.92 596.66,5.92 596.66,110.66 552.31,155 526.42,155 D28.1@506.71,174.71 ; P1.1@465,-1340 403,-1278 403,-1012 v2(405,-1010) 405,-695.73 389.76,-680.49 389.76,-678.76 D11.1@354.35,-678.76 ; D4.1@563.92,517.96 532.97,517.96 514.48,536.44 461.56,536.44 388.28,609.72 388.28,646.26 ; v1(607.44,-452) 646.26,-413.18 D9.1@646.26,-410.65 ; D6.1@747.35,166.6 747.35,63.2 710.69,26.55 710.69,-12 721,-22.31 765,-22.31 D7.1@765,-32.5 765,-106 717,-154 717,-225.07 730.52,-225.07 D8.1@730.52,-229.39 646.26,-313.65 D9.1@646.26,-410.65 ; -747.34,-151 -747.34,-89.66 -693.69,-36 -693.69,5 ; D20.1@-730.52,227 D20.1@-730.52,229.39 -730.52,290.19 -698.59,322.12 -669.35,322.12 -646.26,345.21 D21.1@-646.26,410.65 -618.3,382.69 -530.49,382.69 -517.96,395.23 D22.1@-517.96,563.92 -411.46,563.92 -354.35,621.02 ; D20.1@-730.52,227 -730.52,198.47 -696.41,164.37 -696.41,124 -765,55.41 D19.1@-765,32.5 -737.5,5 -693.69,5 ; -580.31,-452.69 -559.37,-473.63 ; -580.31,-452.69 -595,-438 -617.99,-438 -660,-480.01 v2(-660,-525) -660,-653 -611,-702 -499,-702 -443.26,-646.26 D15.1@-410.65,-646.26 -303.88,-646.26 -241.69,-708.45 -241.69,-730.52 D14.1@-229.39,-730.52 -220,-730.52 -220,-721.07 ; -559.37,-473.63 -563.92,-478.19 D16.1@-563.92,-517.96 -559.37,-473.63 ; -220,-721.07 -212,-713.07 -144.93,-713.07 -96.69,-761.31 -95,-761.31 -53.38,-761.31 ; D11.1@354.35,-678.76 354.35,-596 386.44,-563.92 D10.1@517.96,-563.92 517.96,-497.73 575,-440.69 ; 388.28,646.26 D3.1@410.65,646.26 396,660.91 396,691.63 464.2,759.83 613.22,759.83 670.06,702.99 670.06,567.67 675.06,562.67 675.06,483.62 600.69,409.25 600.69,364 609,355.69 649.31,355.69 665.31,371.69 678.76,371.69 678.76,-197.06 573,-302.82 v2(573,-330) 573,-438.69 575,-440.69 ; 575,-440.69 605.04,-410.65 D9.1@646.26,-410.65
  Bottom Layer w7.87: U3.54@-1370.28,15.63 -1313,15.63 v1(-1281,-16.37) ; C3.2@-1295,580 -1295,502 v1(-1281,488) ; P2.1@-1195,-1360 -975,-1360 -955,-1340 C4.2@-755,-1340 -745,-1350 v1(-590,-1350) ; v4(-790,-450) -715,-525 v2(-660,-525) ; v2(-335,480) -330.32,480 -299.63,510.69 -72.31,510.69 -28,555 -28,631 v1(12,671) v1(81.5,740.5) ; v1@-150,829.94 -57.36,829.94 46.95,934.25 170.16,934.25 U2.54@170.28,934.37 ; v1(-150,830) -115.4,830 -90.4,855 v1(-61,855) ; v1(-5,1308) -5,1420 40.75,1465.75 634.25,1465.75 C2.2@890,1210 ; v1(195,660) v1(195,710) ; v2(208,-1005) 400,-1005 v2(405,-1010) ; P1.1@465,-1340 650,-1155 C1.2@1170,-1155 ; v2(495.68,-350) 553,-350 v2(573,-330) ; v1(607.44,-452) 607.44,-459.44 691,-543 762.23,-543 857.28,-447.95 914.37,-447.95 U1.54@914.37,-490.28
pads on no net: U3.30 U3.31 U3.32 U3.33 U3.34 U3.35 U3.36 U3.37 U3.38 U3.39 U3.40 U3.41 U3.42 U3.43 U3.44 U3.45 U3.46 U3.47 U3.48 U3.49 U3.50 U3.51 U3.52 U3.53

## Polygon pours and split planes (outlines as drawn)
GND on Top Layer "Top Layer-No Net" (solid, remove dead copper, pour order 4): -1520,1530 -1520,-1515 1515,-1515 1510,-1510 1510,1525
GND on Top Layer "Top Layer-No Net" (solid, remove dead copper, pour order 0): -1510,1495 -1510,-1510 1495,-1510 1505,-1500 1530,-1475 1530,1500
GND on Bottom Layer "Top Layer-No Net" (solid, remove dead copper, pour order 6): -1515,1525 1510,1525 1515,1520 1515,-1510 -1515,-1510 -1520,-1515
GND on Bottom Layer "Top Layer-No Net" (solid, remove dead copper, pour order 2): -1510,1500 -1510,-1505 -1515,-1510 1545,-1510 1545,1490 1535,1500

## Keep-outs
Keep-Out Layer:
  circle w7.88: c0,0 r500

## Silkscreen, mask and mechanical layers (free items; w line width, h text height)
Top Overlay:
  circle w7.87: c0,5 r551.18
  circle w7.87: c0,0 r787.4
Bottom Overlay:
  circle w7.87: c0,0 r708.66
Mechanical 1:
  the board outline again, w10